# Altium PCB new.PcbDoc (part 2 of 2)
Units mil, origin at the board's own origin, x right, y up, seen from the top; angles counter-clockwise.
Board outline 4410 x 3685.04 mil, 2 copper layers (Top Layer, Bottom Layer), stack 21 mil thick; 81 components, 203 nets, 659 pads, 105 vias.
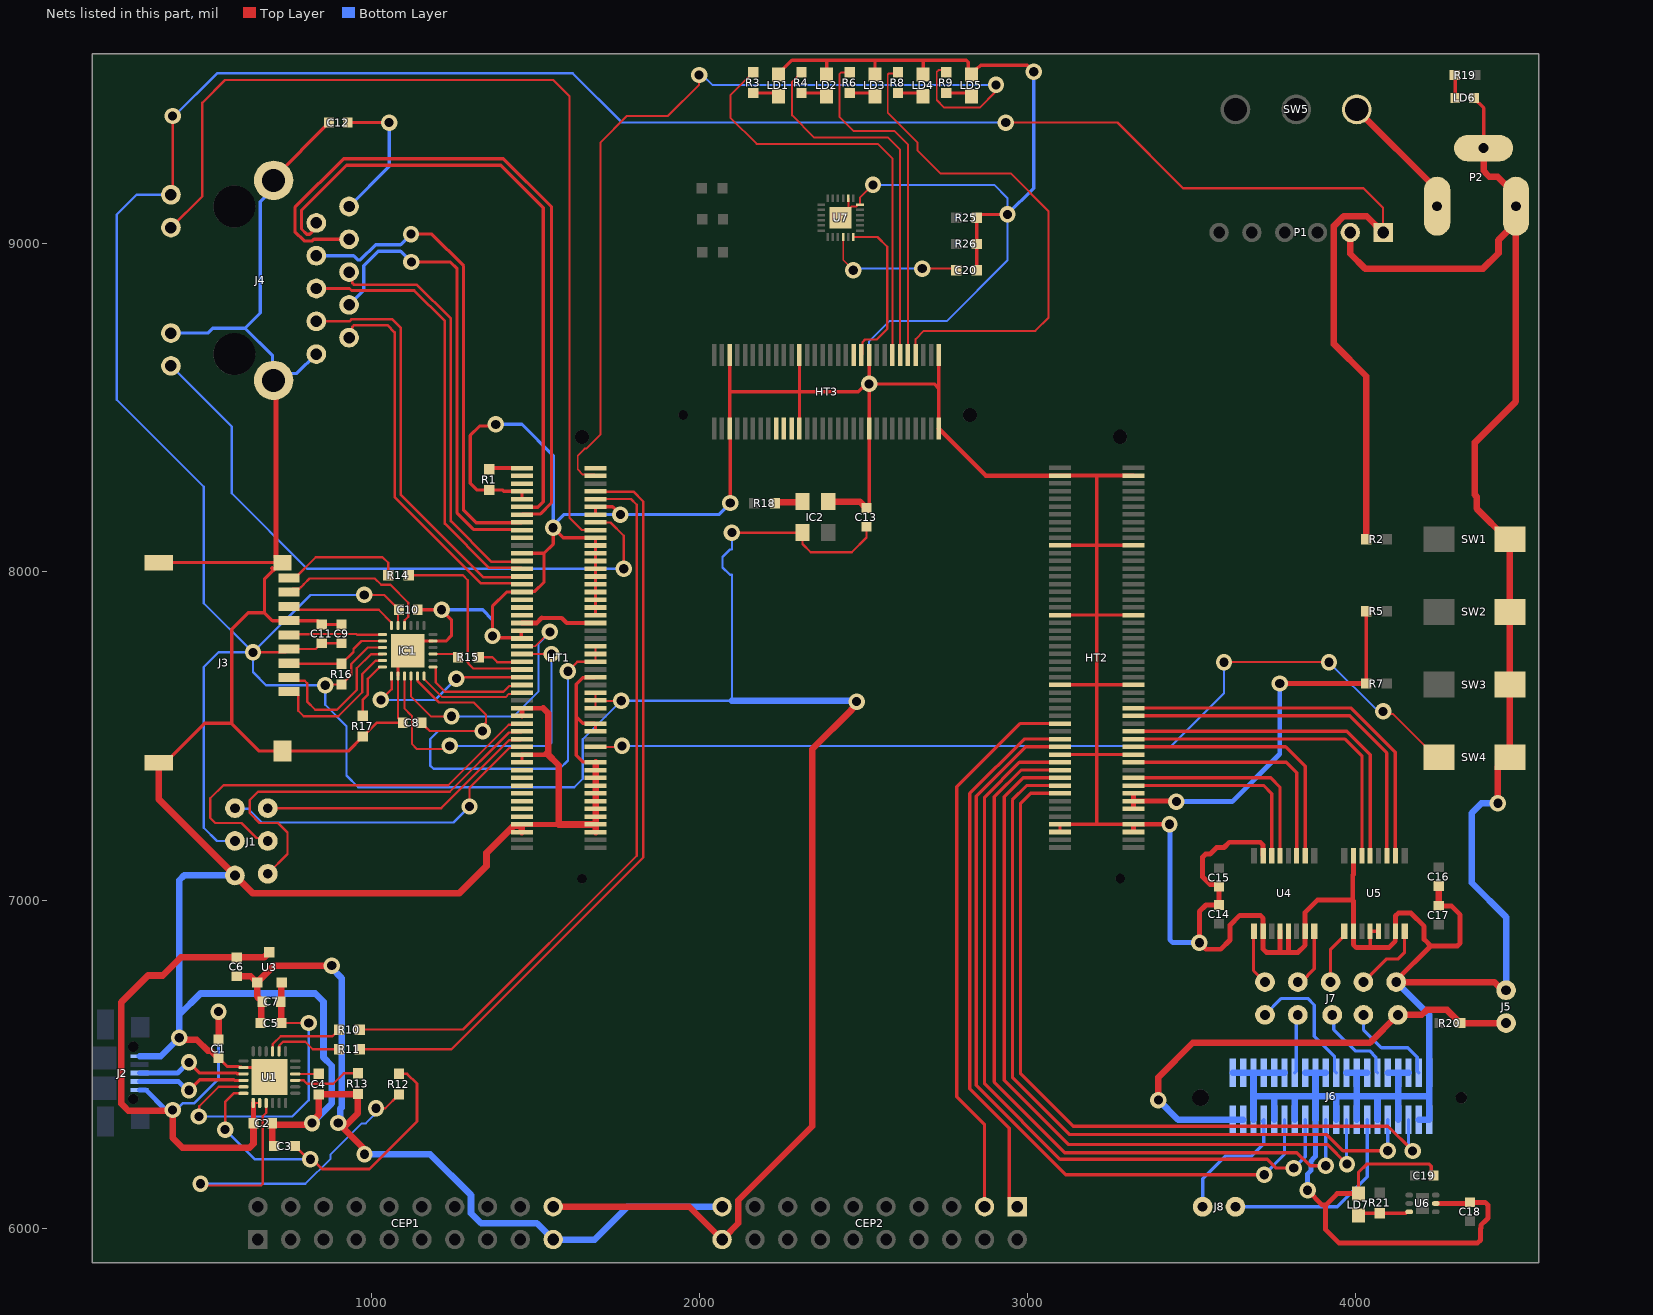
[diagram p2: the nets of this part, all layers, seen from the top]

## Via types
v1: diameter 50, hole 28, Top Layer to Bottom Layer, 103 vias
v2: diameter 39.37, hole 39.37, Top Layer to Bottom Layer, 2 vias

## Nets (pads, with @x,y where several pads share a name; then routed paths per layer and width w, separated by ;. In a path a pad name is that pad's centre, name@x,y a point inside that pad or via, vN(x,y) a via of type N, cw(c..) or ccw(c..) an arc to the next point about the centre after c; other vN are vias at no path point) (continued)
CON35: CEP2.3 HT2.A34 | length 1710.5
  Top Layer w10: CEP2.3@2870,6065 2870,6315 2785,6400 2785,7345 2978.05,7538.05 HT2.A34@3100.31,7538.05
CON36: CEP2.1 HT2.A36 | length 1664
  Top Layer w10: CEP2.1@2970,6065 2945.47,6089.53 2945.47,6304.53 2825,6425 2825,7325 2990.8,7490.8 HT2.A36@3100.31,7490.8
CS1: HT2.B39 U4.11 | length 763.3
  Top Layer w10: HT2.B39@3324.72,7419.94 3790.06,7419.94 3821.5,7388.5 U4.11@3821.5,7135
CS2: HT2.B33 U5.11 | length 1132.1
  Top Layer w10: HT2.B33@3324.72,7561.67 3983.18,7561.67 4096.5,7448.35 U5.11@4096.5,7135
DAT1: HT2.B37 U4.10 | length 820
  Top Layer w10: HT2.B37@3324.72,7467.18 3787.82,7467.18 3847.5,7407.5 U4.10@3847.5,7135
DAT2: HT2.B32 U5.10 | length 1169.2
  Top Layer w10: HT2.B32@3324.72,7585.29 3987.84,7585.29 4122.5,7450.64 U5.10@4122.5,7135
DC5V_IN: P2.1 SW5.3 | length 396.4
  Top Layer w20: SW5.3@4005,9410 4005,9409.92 4249.84,9165.08 P2.1@4249.84,9115
DOUT1: HT2.B41 U4.13 | length 667
  Top Layer w10: HT2.B41@3324.72,7372.69 3742.31,7372.69 3770.5,7344.5 U4.13@3770.5,7135
DOUT2: HT2.B42 U4.14 | length 620.5
  Top Layer w10: HT2.B42@3324.72,7349.07 3720.93,7349.07 3745.5,7324.5 U4.14@3745.5,7135
DOUT3: HT2.B35 U5.13 | length 1058.2
  Top Layer w10: HT2.B35@3324.72,7514.43 3973.86,7514.43 4045.5,7442.78 U5.13@4045.5,7135
DOUT4: HT2.B36 U5.14 | length 1021.5
  Top Layer w10: HT2.B36@3324.72,7490.8 3969.2,7490.8 4020.5,7439.5 U5.14@4020.5,7135
ETH-TD0_N: HT1.A7 J4.3 | length 2170.3
  Top Layer w10: J4.3@932.91,9000.64 919.38,9014.17 825.84,9014.17 820.84,9009.17 795.99,9009.17 767.91,9037.25 767.91,9111.2 916.72,9260 1403.28,9260 1550,9113.28 1550,8210.35 1516.65,8177.01 1499.66,8177.01 1499.58,8176.93 1461.64,8176.93 HT1.A7@1459.91,8175.2
ETH-TD0_P: HT1.A6 J4.2 | length 1949
  Top Layer w10: J4.2@832.91,9064.17 832.91,9050.64 818.42,9036.15 818.42,9035.03 812.56,9029.17 804.27,9029.17 787.91,9045.53 787.91,9102.91 925,9240 1395,9240 1525,9110 1525,8213.64 1508.37,8197.01 1499.66,8197.01 1499.58,8197.09 1461.64,8197.09 HT1.A6@1459.91,8198.82
ETH-TD1_N: HT1.A9 J4.7 | length 1426.4
  Top Layer w10: v1(1122.91,8945) 1241.72,8945 1262,8924.72 1262,8179.72 1311.95,8129.76 1420.15,8129.76 1420.23,8129.69 1458.17,8129.69 HT1.A9@1459.91,8127.95
  Bottom Layer w10: J4.7@932.91,8814.17 977.91,8859.17 977.91,8933.32 1022.1,8977.5 1089.85,8977.5 1122.35,8945 v1(1122.91,8945)
ETH-TD1_P: HT1.A8 J4.4 | length 1467
  Top Layer w10: v1(1121.8,9030) 1185,9030 1282,8933 1282,8188 1320.24,8149.76 1420.15,8149.76 1420.23,8149.84 1458.17,8149.84 HT1.A8@1459.91,8151.57
  Bottom Layer w10: J4.4@832.91,8964.17 946.55,8964.17 959.38,8951.35 967.66,8951.35 1013.81,8997.5 1089.85,8997.5 1121.8,9029.44 v1(1121.8,9030)
ETH-TD2_N: HT1.A14 J4.6 | length 1342.3
  Top Layer w8: J4.6@832.91,8864.17 934.23,8864.17 940.23,8858.17 1131.37,8858.17 1225,8764.54 1225,8147.54 1359.89,8012.65 1420.56,8012.65 1420.64,8012.57 1457.17,8012.57 HT1.A14@1459.91,8009.84
ETH-TD2_P: HT1.A13 J4.5 | length 1269.2
  Top Layer w8: J4.5@932.91,8914.17 942.86,8904.22 942.86,8880.99 947.68,8876.17 1138.83,8876.17 1243,8772 1243,8155 1367.35,8030.65 1420.56,8030.65 1420.64,8030.73 1457.17,8030.73 HT1.A13@1459.91,8033.46
ETH-TD3_N: HT1.A16 J4.9 | length 1177.7
  Top Layer w8: J4.9@932.91,8714.17 942.86,8724.12 942.86,8747.35 947.68,8752.17 1050.31,8752.17 1072,8730.49 1072,8228 1334.59,7965.41 1420.56,7965.41 1420.64,7965.33 1457.17,7965.33 HT1.A16@1459.91,7962.6
ETH-TD3_P: HT1.A15 J4.8 | length 1255
  Top Layer w8: J4.8@832.91,8764.17 934.23,8764.17 940.23,8770.17 1064.83,8770.17 1090,8745 1090,8235.46 1342.05,7983.41 1420.56,7983.41 1420.64,7983.49 1457.17,7983.49 HT1.A15@1459.91,7986.22
ETH_AVDD3V3: HT1.A10
ETH_LDA: HT1.B8 J4.14 | length 1958.5
  Top Layer w7: HT1.B8@1684.32,8151.57 1685.1,8150.79 1729.77,8150.79 1770,8110.55 v1(1770,8010)
  Bottom Layer w7: J4.14@390,8628.35 575,8443.35 575,8240 805,8010 v1(1770,8010)
ETH_LDB: HT1.B9 J4.12 | length 2968.7
  Top Layer w7: J4.12@390,9050 485,9145 485,9430 555,9500 1555,9500 1605,9450 1605,8165 1642.05,8127.95 HT1.B9@1684.32,8127.95
GND: C1.1 C2.2 C3.1 C4.1 C5.1 C6.1 C7.1 C8.2 C9.2 C10.2 C11.2 C12.1 C13.2 C14.2 C15.2 C16.2 C17.2 C18.1 C19.2 C20.1 CEP1.19 CEP2.19 HT1.A4 HT1.A5 HT1.A12 HT1.A17 HT1.A22 HT1.A23 HT1.A32 HT1.A33 HT1.A38 HT1.A39 HT1.A47 HT1.A48 HT1.B6 HT1.B7 HT1.B10 HT1.B11 HT1.B12 HT1.B13 HT1.B14 HT1.B15 HT1.B16 HT1.B17 HT1.B18 HT1.B19 HT1.B20 HT1.B28 HT1.B34 HT1.B35 HT1.B39 HT1.B40 HT1.B41 HT1.B42 HT1.B43 HT1.B44 HT1.B45 HT1.B46 HT1.B47 HT1.B48 HT2.A2 HT2.A11 HT2.A20 HT2.A29 HT2.A38 HT2.A47 HT2.A48 HT2.B2 HT2.B11 HT2.B20 HT2.B29 HT2.B38 HT2.B47 HT2.B48 HT3.A1 HT3.A10 HT3.A19 HT3.A28 HT3.B1 HT3.B10 HT3.B19 HT3.B28 IC1.2 IC1.11 IC1.P IC2.2 J1.6 J2.5 J3.0 J3.6 J3.10 J3.11 J3.12 J4.10 J4.13 J4.15 J4.16 J5.1 J6.1 J6.3 J6.4 J6.5 J6.7 J6.8 J6.9 J6.11 J6.12 J6.13 J6.15 J6.16 J6.17 J6.18 J6.19 J6.20 J6.23 J6.25 J6.27 J6.29 J6.31 J6.33 J6.35 J6.37 J6.39 J6.40 J7.9 LD1.2 LD2.2 LD3.2 LD4.2 LD5.2 LD6.K LD7.2 P1.2 P2.2 R1.1 R13.2 R17.1 R25.2 R26.2 SW1.2 SW2.2 SW3.2 SW4.2 U1.2 U1.25 U3.1 U4.2 U4.4 U4.5 U4.7 U4.15 U5.2 U5.4 U5.5 U5.7 U5.15 U6.5 U7.18 U7.20 U7.25 | length 34356.6
  Top Layer w6: U7.20@2454.72,9139.06 2454.72,9103.56 2465.41,9114.24 2479.79,9114.24 2484.92,9119.38 U7.18@2490.15,9119.38 2490.15,9140.15 v1(2530,9180)
  Top Layer w7: R17.1@975,7498.5 1016.5,7540 C8.2@1096.46,7540 1096.46,7540.98 1082.24,7555.2 IC1.2@1082.24,7683.07
  Top Layer w10: J3.11@352.36,7418.62 372.05,7418.62 492.57,7539.14 574.14,7539.14 ; J3.0@352.36,8028.86 726.38,8028.86 675,7977.48 675,7875.86 ; C1.1@535,6517.91 535.98,6517.91 561.4,6492.5 597.57,6492.5 599.91,6490.16 604.06,6490.16 604.69,6489.53 U1.2@611.26,6489.53 660.47,6489.53 U1.25@690,6460 ; J4.15@702.99,9194.09 702.99,9200.55 871.46,9369.02 C12.1@871.46,9370 ; C9.2@910,7840 C11.2@850,7840 849.02,7840 837.32,7851.69 J3.6@750,7851.69 699.16,7851.69 675,7875.86 ; R17.1@975,7498.5 930.55,7454.06 J3.12@730.32,7454.06 659.23,7454.06 574.14,7539.14 ; IC1.2@1082.24,7683.07 1082.24,7730.31 IC1.P@1111.77,7759.84 1141.3,7789.37 IC1.11@1188.54,7789.37 ; C10.2@1142.09,7885 v1(1215,7885) 1245,7855 1245,7805 1229.61,7789.61 IC1.11@1201.71,7789.61 ; v1(1380,8450) 1375,8445 1330.86,8445 1302,8416.14 1302,8270 1322,8250 R1.1@1360,8250 1399.99,8250 1403.93,8246.06 HT1.A4@1459.91,8246.06 HT1.A5@1459.91,8222.44 ; HT1.A39@1459.91,7419.29 HT1.A38@1459.91,7442.91 ; HT1.A22@1459.91,7820.87 1458.02,7818.98 1458.02,7799.13 1375.87,7799.13 v1(1370,7805) 1370,7895 1413.98,7938.98 HT1.A17@1459.91,7938.98 1461.64,7940.71 1499.58,7940.71 1527.09,7968.21 1527.09,8057.09 ; HT1.A12@1459.91,8057.09 1527.09,8057.09 ; 1532.06,7442.91 1536.03,7446.89 1540,7450.86 ; HT1.B39@1684.32,7419.29 1682.58,7421.02 1644.64,7421.02 1625,7440.66 1625,7558.77 ; HT1.B35@1684.32,7513.78 HT1.B34@1684.32,7537.4 1682.58,7539.13 1644.64,7539.13 1625,7558.77 ; HT1.B28@1684.32,7679.13 1682.58,7677.4 1644.64,7677.4 1625,7657.76 1625,7558.77 ; HT1.B20@1684.32,7868.11 HT1.B19@1684.32,7891.73 HT1.B18@1684.32,7915.35 HT1.B17@1684.32,7938.98 HT1.B16@1684.32,7962.6 HT1.B15@1684.32,7986.22 HT1.B14@1684.32,8009.84 HT1.B13@1684.32,8033.46 HT1.B12@1684.32,8057.09 HT1.B11@1684.32,8080.71 HT1.B10@1684.32,8104.33 1585.67,8104.33 v1(1555,8135) 1555,8085 1527.09,8057.09 ; HT1.B7@1684.32,8175.2 HT1.B6@1684.32,8198.82 1736.18,8198.82 v1(1760,8175) ; HT3.A28@2093.08,8661.58 2093.08,8549.37 ; v1(2094.81,8210.19) 2094.81,8435.43 HT3.B28@2093.08,8437.17 2093.08,8549.37 ; LD1.2@2241.86,9516.93 2241.86,9518.9 2282.97,9560 2390,9560 ; HT3.B19@2305.68,8437.17 2305.68,8549.37 ; HT3.A19@2305.68,8661.58 2305.68,8549.37 ; LD2.2@2388.9,9516.93 2388.9,9558.9 2390,9560 ; C13.2@2510,8195 2518.28,8203.28 HT3.B10@2518.28,8437.17 v1(2518.28,8573.28) ; HT3.A10@2518.28,8661.58 v1(2518.28,8573.28) ; LD3.2@2535.93,9516.93 2535.93,9559.07 2535,9560 ; LD4.2@2682.97,9516.93 2682.97,9557.03 2680,9560 ; HT3.B1@2730.87,8437.17 2730.87,8559.13 ; HT3.A1@2730.87,8661.58 2730.87,8559.13 ; C20.1@2846.5,8920 R26.2@2846.5,9000 R25.2@2846.5,9080 2856.5,9090 v1(2940,9090) ; v1(3020,9525) 3000,9545 2858.07,9545 2846.65,9533.58 2844.68,9533.58 2830,9518.9 LD5.2@2830,9516.93 2820,9526.93 2820,9554.14 2814.14,9560 2680,9560 ; HT2.A48@3100.31,7207.34 HT2.A47@3100.31,7230.96 3212.51,7230.96 ; HT2.A38@3100.31,7443.56 3212.51,7443.56 ; HT2.A29@3100.31,7656.16 3212.51,7656.16 ; HT2.A20@3100.31,7868.76 3212.51,7868.76 ; HT2.A11@3100.31,8081.35 3212.51,8081.35 ; 3212.51,8293.95 3212.51,8081.35 ; HT2.B47@3324.72,7230.96 3212.51,7230.96 ; HT2.B38@3324.72,7443.56 3212.51,7443.56 ; HT2.B29@3324.72,7656.16 3212.51,7656.16 ; HT2.B20@3324.72,7868.76 3212.51,7868.76 ; HT2.B11@3324.72,8081.35 3212.51,8081.35 ; LD7.2@4010,6105 4010,6170 4035,6195 4226.23,6195 4232.09,6189.14 4232.09,6166.46 C19.2@4238.54,6160 ; 4045,6855 4045.5,6855.5 U5.4@4045.5,6905 U5.5@4071.5,6905 ; U6.5@4245.49,6075 U6.5@4246.32,6075.83 ; LD6.K@4362.09,9445 4362.09,9444.02 4391.57,9414.53 P2.2@4391.57,9292 ; 574.14,7539.14 575,7540 575,7825 625.86,7875.86 675,7875.86 ; 2093.08,8549.37 2305.68,8549.37 ; 2305.68,8549.37 2485.61,8549.37 2509.52,8573.28 v1(2518.28,8573.28) ; 2390,9560 2535,9560 ; v1(2518.28,8573.28) 2716.72,8573.28 2730.87,8559.13 ; 2535,9560 2680,9560 ; 3212.51,7230.96 3212.51,7443.56 ; 3212.51,7443.56 3212.51,7656.16 ; 3212.51,7656.16 3212.51,7868.76 ; 3212.51,7868.76 3212.51,8081.35
  Top Layer w13: HT2.A2@3100.31,8293.95 3212.51,8293.95 HT2.B2@3324.72,8293.95
  Top Layer w14: HT1.A38@1459.91,7442.91 1532.06,7442.91 ; HT1.A32@1459.91,7584.65 1524.65,7584.65 ; HT3.B1@2731.14,8437.17 2874.35,8293.95 HT2.A2@3100.31,8293.95
  Top Layer w15: J4.16@702.99,8584.25 710.26,8576.99 710.26,8044.98 726.38,8028.86 J3.10@730.32,8028.86 ; HT1.A47@1459.91,7230.32 1572.11,7230.32 ; HT1.A33@1459.91,7561.02 HT1.A32@1459.91,7584.65 ; HT2.B48@3324.72,7211.22 HT2.B47@3324.72,7230.96 v1(3434.04,7230.96) v1@3435,7230 ; U4.15@3719.5,7135 3719.5,7167.31 3710.71,7176.1 3616.1,7176.1 3600,7160 3577.5,7160 3557.5,7140 3543.79,7140 3535,7131.21 3535,7070 3557.74,7047.26 3577.74,7047.26 C15.2@3585,7040 C14.2@3585,6985 3545,6985 3525,6965 v1(3525,6870) 3545,6850 3590,6850 3618.25,6878.25 3618.25,6923.25 3648.29,6953.29 3710.71,6953.29 3719.5,6944.5 U4.2@3719.5,6905 3719.5,6850.5 3730,6840 3770,6840 ; U4.4@3770.5,6905 3770.5,6840.5 3770,6840 ; U4.5@3796.5,6905 3796.5,6841 3797.5,6840 ; v1(3855,6115) 3900,6070 3910,6070 ; U5.15@3994.5,7135 3994.5,7078.39 3992.5,7076.39 3992.5,6999.75 ; LD7.2@4010,6105 3945,6105 3910,6070 ; J7.9@4125,6750 4125,6755 4230,6860 ; U6.5@4249.94,6074.67 4346.12,6074.67 C18.1@4350,6078.54 4396.21,6078.54 4405,6069.76 4405,6030 4400,6025 4400,6024.77 4383.25,6008.02 4383.25,5999.44 4382.38,5998.58 4382.38,5963.79 4373.6,5955 3950,5955 3910,5995 3910,6070 ; C17.2@4255,6982.09 4292.91,6982.09 4320,6955 4320,6868.79 4311.21,6860 4230,6860 ; 3770,6840 3797.5,6840 ; 3797.5,6840 3825,6840 3847.5,6862.5 U4.7@3847.5,6905 3847.5,6962.5 3884.75,6999.75 3992.5,6999.75 ; 3992.5,6999.75 3994.5,6997.75 U5.2@3994.5,6905 3994.5,6863.79 4003.29,6855 4045,6855 4102.7,6855 4122.15,6874.45 4122.15,6904.65 U5.7@4122.5,6905 4122.5,6951.21 4131.29,6960 4170,6960 4210,6920 4210,6880 4230,6860
  Top Layer w20: J3.11@352.36,7418.62 352.36,7307.64 J1.6@585,7075 640,7020 1268.28,7020 1351.76,7103.48 1351.76,7143.57 1435.24,7227.05 1459.91,7227.05 HT1.A48@1459.91,7206.69 ; v1@416.04,6581.04 v1(415,6580) 420.74,6574.26 468.86,6574.26 502.88,6540.24 511.69,6540.24 534.02,6517.91 C1.1@535,6517.91 ; C6.1@590,6767.91 633.43,6767.91 U3.1@652.6,6748.74 ; C5.1@663.5,6625 665.71,6627.2 665.71,6687.8 C7.1@667.91,6690 667.91,6690.98 652.6,6706.3 U3.1@652.6,6748.74 ; C2.2@698.54,6320 C2.2@698.54,6319.76 ; C3.1@705,6250 699.25,6255.75 699.25,6273.54 698.54,6274.25 C2.2@698.54,6319.76 ; v1(880,6800) 703.86,6800 U3.1@652.6,6748.74 ; v1(899.82,6320.18) v1@915,6305 ; v1(980,6225) 980,6240 v1@915,6305 ; 1524.65,7584.65 1540,7569.29 1540,7450.86 ; 1536.03,7446.89 1572.11,7410.8 1572.11,7230.32 HT1.B47@1684.32,7230.32 ; HT1.B48@1684.32,7206.69 HT1.B47@1684.32,7230.32 ; HT1.B39@1684.32,7419.29 HT1.B40@1684.32,7395.67 HT1.B41@1684.32,7372.05 HT1.B42@1684.32,7348.43 HT1.B43@1684.32,7324.8 HT1.B44@1684.32,7301.18 HT1.B45@1684.32,7277.56 HT1.B46@1684.32,7253.94 HT1.B47@1684.32,7230.32 ; IC2.2@2393.74,8214.49 2489.53,8214.49 2509.02,8195 C13.2@2510,8195 ; P1.2@3985,9035 3985,8970 4030,8925 4390,8925 4436.76,8971.76 4436.76,9011.76 P2.2@4490,9065 ; J7.9@4125,6750 4424.18,6750 4449.18,6725 J5.1@4460,6725 ; C17.2@4255,6982.09 C16.2@4255,7042.91 ; P2.2@4391.57,9292 4391.57,9222 4408.81,9204.76 4434,9204.76 4490,9148.76 P2.2@4490,9115 P2.2@4490,9065 ; v1(4435,7295) 4435,7405.63 4464.37,7435 SW4.2@4471.54,7435 SW3.2@4471.54,7656.67 SW2.2@4471.54,7878.33 SW1.2@4471.54,8100 4463.66,8100 4370,8193.66 4370,8230 4365,8235 4365,8395 4490,8520 P2.2@4490,9065 ; C2.2@698.54,6319.76 703.31,6315 810,6315 840,6345 C4.1@840,6407.01 840.75,6407.76 959.25,6407.76 R13.2@960,6408.5 960,6350 v1@915,6305
  Bottom Layer w6: v1(2518.28,8573.28) 2518.28,8703.28 2580,8765 2755,8765 2940,8950 v1(2940,9090) 2940,9140 2900,9180 v1(2530,9180)
  Bottom Layer w10: J4.13@390,8728.35 502.17,8728.35 517,8743.17 615.64,8743.17 ; J4.15@702.99,9194.09 702.99,9170.19 661.91,9129.11 661.91,8789.45 615.64,8743.17 ; J4.10@832.91,8664.17 774.04,8605.3 724.04,8605.3 J4.16@702.99,8584.25 699.56,8587.69 699.56,8659.25 615.64,8743.17 ; v1(1215,7885) 1340,7885 1370,7855 v1(1370,7805) ; v1(1380,8450) 1460,8450 1555,8355 v1@1555,8143.06 ; v1(1555,8135) v1@1555,8143.06 ; v1(2094.81,8210.19) 2059.62,8175 v1(1760,8175) 1586.94,8175 v1@1555,8143.06 ; v1(2940,9090) 3020,9170 v1(3020,9525)
  Bottom Layer w15: v1(3434.04,7230.96) 3435,7230 3435,6878.79 3443.79,6870 v1(3525,6870) ; v1(3855,6115) 3855,6165 3865,6175 3865,6203.18 3869.98,6208.16 3869.98,6209.61 3878.97,6218.6 J6.29@3878.97,6330
  Bottom Layer w20: J2.5@294.33,6523.82 358.82,6523.82 v1(415,6580) 415,6650 ; J1.6@585,7075 430,7075 415,7060 415,6650 ; v1(820,6320) 880,6380 880,6495 855,6520 855,6690 830,6715 480,6715 415,6650 ; v1(880,6800) 880,6791.88 910,6761.88 910,6367.57 905.56,6363.13 905.56,6325.92 v1(899.82,6320.18) ; v1(980,6225) 1180,6225 1304.53,6100.47 1304.53,6045.43 1335.43,6014.53 1505.47,6014.53 CEP1.19@1555,5965 1681.7,5965 1781.7,6065 CEP2.19@2070,6065 ; J6.20@3627,6473.31 J6.19@3658.5,6473.31 J6.18@3690,6473.31 ; J6.23@3690,6330 3690,6401.65 ; J6.25@3752.99,6330 3752.99,6399.65 3755,6401.65 ; J6.15@3784.48,6473.31 J6.16@3752.99,6473.31 J6.17@3721.49,6473.31 J6.18@3690,6473.31 ; J6.27@3815.98,6330 3815.98,6397.64 3820,6401.65 ; J6.13@3847.48,6473.31 J6.12@3878.97,6473.31 ; J6.29@3878.97,6330 3878.97,6401.65 ; J6.11@3910.47,6473.31 J6.12@3878.97,6473.31 ; J6.31@3941.96,6330 3941.96,6399.69 3940,6401.65 ; J6.9@3973.46,6473.31 J6.8@4004.96,6473.31 ; J6.33@4004.96,6330 4004.96,6401.61 4005,6401.65 4065,6401.65 ; J6.7@4036.45,6473.31 J6.8@4004.96,6473.31 ; J6.35@4067.95,6330 4067.95,6398.7 4065,6401.65 ; J6.5@4099.44,6473.31 J6.4@4130.94,6473.31 ; J7.9@4125,6750 4225.43,6649.57 J6.1@4225.43,6473.31 4225.43,6401.65 ; J6.37@4130.94,6330 4130.94,6400.72 4130,6401.65 ; J6.3@4162.44,6473.31 J6.4@4130.94,6473.31 ; J6.39@4193.93,6330 J6.40@4225.43,6330 4225.43,6401.65 ; v1(4435,7295) 4385,7295 4355,7265 4355,7052.91 4460,6947.91 J5.1@4460,6725 ; 3690,6401.65 3755,6401.65 ; 3690,6401.65 J6.18@3690,6473.31 ; 3755,6401.65 3820,6401.65 ; 3820,6401.65 3878.97,6401.65 ; 3878.97,6401.65 3940,6401.65 ; 3878.97,6401.65 J6.12@3878.97,6473.31 ; 3940,6401.65 4004.96,6401.65 J6.8@4004.96,6473.31 ; 4065,6401.65 4130,6401.65 ; 4130,6401.65 4130.94,6402.6 J6.4@4130.94,6473.31 ; 4130,6401.65 4225.43,6401.65
H17: HT3.B22
IFI1: J6.10 J7.2 | length 413.4
  Bottom Layer w10: J7.2@3725,6650 3775,6700 3855,6700 3875,6680 3875,6585 3937.12,6522.88 3937.12,6478.15 J6.10@3941.96,6473.31
IFI2: J6.6 J7.6 | length 259.9
  Bottom Layer w10: J7.6@3930,6650 3935,6645 3935,6605 4000,6540 4044.52,6540 4063.11,6521.41 4063.11,6478.15 J6.6@4067.95,6473.31
IFQ1: J6.14 J7.4 | length 180.4
  Bottom Layer w10: J6.14@3815.98,6473.31 3820.49,6477.82 3820.49,6645.49 J7.4@3825,6650
IFQ2: J6.2 J7.8 | length 293.8
  Bottom Layer w10: J7.8@4025,6650 4025,6605 4080,6550 4160.51,6550 4189.09,6521.42 4189.09,6478.15 J6.2@4193.93,6473.31
J16: HT3.B20
K16: HT3.B21
K17: HT3.A12
K18: HT3.A11 U7.12 | length 497.1
  Top Layer w7: U7.12@2472.16,9020.94 2544.05,9020.94 2573.5,8991.5 2573.5,8740.42 2541.62,8708.54 2505.79,8708.54 2497.89,8700.63 2497.89,8664.81 HT3.A11@2494.65,8661.58
LED1: HT3.A7 R3.2 | length 1312.5
  Top Layer w6: R3.2@2165,9522.9 2095,9452.9 2095,9385 2175,9305 2545,9305 2590,9260 2590,8662.43 HT3.A7@2589.14,8661.58
LED2: HT3.A6 R4.2 | length 1141.5
  Top Layer w6: R4.2@2312.03,9522.9 2283.29,9494.15 2283.29,9391.71 2350,9325 2575,9325 2612.76,9287.24 HT3.A6@2612.76,8661.58
LED3: HT3.A5 R6.2 | length 1049.5
  Top Layer w6: R6.2@2459.07,9522.9 2432.9,9522.9 2427.49,9517.49 2427.49,9387.51 2470,9345 2595,9345 2636.39,9303.61 HT3.A5@2636.39,8661.58
LED4: HT3.A4 R8.2 | length 1584.5
  Top Layer w6: R8.2@2606.1,9522.9 2603.2,9520 2578.51,9520 2575,9516.49 2575,9400 2665,9310 2665,9285 2735,9215 2950,9215 3065,9100 3065,8775 3025,8735 2685,8735 2660.01,8710.01 HT3.A4@2660.01,8661.58
LED5: HT1.B2 R9.2 | length 2762.3
  Top Layer w6: HT1.B2@1684.32,8293.31 1680.58,8297.04 1645.47,8297.04 1630,8312.51 1630,8355 1651.03,8376.03 1656.6,8376.03 1700,8419.43 1700,9310 1780,9390 1905,9390 2000,9485 v1(2000,9515) ; R9.2@2753.14,9522.9 2746.04,9530 2730,9530 2724.39,9524.39 2724.39,9438.78 2747.82,9415.35 2855.07,9415.35 2905,9465.28 v1(2905,9485)
  Bottom Layer w6: v1(2000,9515) 2010,9515 2040,9485 v1(2905,9485)
NetC4_2: C4.2 U1.16 | length 71.3
  Top Layer w7: U1.16@768.74,6469.84 839.84,6469.84 C4.2@840,6470
NetC12_2: C12.2 J4.1 | length 432.9
  Top Layer w10: C12.2@928.54,9370 v1(1055,9370)
  Bottom Layer w10: J4.1@932.91,9114.17 1055,9236.26 v1(1055,9370)
NetC20_2: C20.2 U7.10 | length 431.4
  Top Layer w5: U7.10@2438.97,9020.94 2438.97,8951.03 v1(2470,8920) ; v1(2680,8925) 2778.5,8925 C20.2@2783.5,8920
  Bottom Layer w5: v1(2470,8920) 2475,8925 v1(2680,8925)
NetIC1_24: IC1.24 R17.2 | length 179.2
  Top Layer w7: R17.2@975,7561.5 975,7610.96 990.25,7626.21 990.25,7674.74 1026.14,7710.63 IC1.24@1035,7710.63
NetIC2_3: IC2.3 R18.2 | length 85.4
  Top Layer w20: R18.2@2231.5,8210 2233.74,8212.24 2312.76,8212.24 IC2.3@2315,8214.49
NetLD1_1: LD1.1 R3.1 | length 81
  Top Layer w10: R3.1@2165,9459.91 2231.95,9459.91 LD1.1@2241.86,9450
NetLD2_1: LD2.1 R4.1 | length 81
  Top Layer w10: R4.1@2312.03,9459.91 2378.99,9459.91 LD2.1@2388.9,9450
NetLD3_1: LD3.1 R6.1 | length 81
  Top Layer w10: R6.1@2459.07,9459.91 2526.02,9459.91 LD3.1@2535.93,9450
NetLD4_1: LD4.1 R8.1 | length 81
  Top Layer w10: R8.1@2606.1,9459.91 2673.06,9459.91 LD4.1@2682.97,9450
NetLD5_1: LD5.1 R9.1 | length 81
  Top Layer w10: R9.1@2753.14,9459.91 2820.09,9459.91 LD5.1@2830,9450
NetLD6_A: LD6.A R19.2 | length 70.6
  Top Layer w10: R19.2@4303.5,9515 4305,9513.5 LD6.A@4305,9445
NetLD7_1: LD7.1 R21.1 U6.3 | length 159.2
  Top Layer w10: LD7.1@4010,6038.07 4016.93,6045 R21.1@4075,6045 4154.14,6045 4158.55,6049.41 U6.3@4164.51,6049.41
NetR10_1: R10.1 U1.21 | length 242.2
  Top Layer w7: U1.21@699.84,6538.74 700.39,6539.28 700.39,6560.83 724.55,6585 882.01,6585 R10.1@902.01,6605
NetR11_1: R11.1 U1.20 | length 214.2
  Top Layer w7: U1.20@719.53,6538.74 720.07,6539.28 720.07,6556.48 731.58,6567.99 799.18,6567.99 822.17,6545 R11.1@902.01,6545
NetR12_1: R12.1 U1.9 | length 1178.7
  Top Layer w7: v1(480,6135) 485,6130 665,6130 670,6135 670,6341.06 680.16,6351.22 U1.9@680.16,6381.26 ; v1(1015,6365) 1042.99,6365 R12.1@1085,6407.01
  Bottom Layer w6: 800,6135 876.47,6211.47 876.47,6224.56 970.92,6319 984,6319 v1@1006.77,6341.77
  Bottom Layer w7: v1(480,6135) 800,6135 ; v1@1006.77,6341.77 1006.77,6356.77 v1(1015,6365)
NetR13_1: R13.1 U1.15 | length 208.5
  Top Layer w7: U1.15@768.74,6450.16 794.84,6450.16 805,6440 885,6440 916.5,6471.5 R13.1@960,6471.5
OTG_D+: HT1.A18
OTG_D-: HT1.A19
OTG_ID: HT1.A20
PS_RST: HT1.B37 SW4.1 | length 2853.5
  Top Layer w6: HT1.B37@1684.32,7466.54 1761.54,7466.54 v1(1765,7470) ; v1(3600,7725) v1(3920,7725) ; v1(4085,7575) 4093.42,7566.58 4115.55,7566.58 4247.13,7435 SW4.1@4255,7435
  Bottom Layer w6: v1(1765,7470) 3440,7470 3600,7630 v1(3600,7725) ; v1(3920,7725) 4070,7575 v1(4085,7575)
R_ANA: J6.34 J8.2 | length 612.9
  Bottom Layer w10: J8.2@3635,6065 3945,6065 4036.45,6156.45 J6.34@4036.45,6330
R_CLK: HT2.A39 J6.28 | length 2358.6
  Top Layer w10: HT2.A39@3100.31,7419.94 2976.51,7419.94 2870,7313.43 2870,6440 3100,6210 3731.57,6210 3758.63,6182.94 v1(3812.94,6182.94)
  Bottom Layer w10: v1(3812.94,6182.94) 3847.48,6217.48 J6.28@3847.48,6330
R_DAT: HT2.A41 J6.32 | length 2345.5
  Top Layer w10: HT2.A41@3100.31,7372.69 2987.69,7372.69 2930,7315 2930,6450 3125,6255 3915,6255 v1(3975,6195)
  Bottom Layer w10: J6.32@3973.46,6330 3973.46,6196.54 v1(3975,6195)
R_LEP: HT2.A40 J6.30 | length 2360.2
  Top Layer w10: HT2.A40@3100.31,7396.32 2981.17,7396.32 2900,7315.15 2900,6445 3115,6230 3822.45,6230 3862.45,6190 v1(3910.47,6190)
  Bottom Layer w10: v1(3910.47,6190) J6.30@3910.47,6330
R_LER: HT2.A37 J6.26 | length 2382.9
  Top Layer w10: HT2.A37@3100.31,7467.18 2995.47,7467.18 2845,7316.72 2845,6435 3117.5,6162.5 v1(3722.5,6162.5)
  Bottom Layer w10: v1(3722.5,6162.5) 3784.48,6224.48 J6.26@3784.48,6330
R_MUX: HT2.A42 J6.36 | length 2341.2
  Top Layer w10: HT2.A42@3100.31,7349.07 2999.07,7349.07 2955,7305 2955,6460 3130,6285 3913.28,6285 3962.72,6235.56 v1(4099.44,6235.56)
  Bottom Layer w10: J6.36@4099.44,6330 v1(4099.44,6235.56) v1@4100,6235
R_TXD: HT2.A43 J6.38 | length 2350.5
  Top Layer w10: HT2.A43@3100.31,7325.45 3010.45,7325.45 2980,7295 2980,6470 3140,6310 4100,6310 v1(4175,6235)
  Bottom Layer w10: J6.38@4162.44,6330 4162.44,6247.56 v1(4175,6235)
R_VT: J6.24 J8.1 | length 396
  Bottom Layer w10: J8.1@3535,6065 3535,6150 3605,6220 3685,6220 3721.49,6256.49 J6.24@3721.49,6330 J6.24@3716.65,6325.16
RAD_VCC: J5.2 J6.21 J6.22 J7.10 R20.2 | length 1514.8
  Top Layer w20: v1(3400,6390) 3400,6460 3505,6565 4045,6565 J7.10@4130,6650 4202.91,6650 4217.91,6665 4280,6665 R20.2@4320,6625 J5.2@4460,6625
  Bottom Layer w20: v1(3400,6390) 3460,6330 J6.21@3627,6330 J6.22@3658.5,6330
RIN1: J7.1 U4.1 | length 170.1
  Top Layer w10: U4.1@3691.5,6905 3690,6903.5 3690,6785 J7.1@3725,6750
RIN2: J7.3 U4.8 | length 181.8
  Top Layer w10: J7.3@3825,6750 3835,6750 3875,6790 3875,6904.5 U4.8@3875.5,6905
RIN3: J7.5 U5.1 | length 172.2
  Top Layer w10: J7.5@3925,6750 3925,6849.75 3966.5,6891.25 U5.1@3966.5,6905
RIN4: J7.7 U5.8 | length 227.5
  Top Layer w10: J7.7@4025,6750 4095,6820 4130,6820 4150.5,6840.5 U5.8@4150.5,6905
SD1_CD: HT1.A40
SD1_CLK: HT1.A41
SD1_CMD: HT1.A42
SD1_D0: HT1.A44
SD1_D1: HT1.A45
SD1_D2: HT1.A46
SD1_D3: HT1.A43
SD_CCLK: HT1.A26 R15.2 | length 138.7
  Top Layer w7: R15.2@1327.99,7740 1370,7740 1385,7725 1458.53,7725 HT1.A26@1459.91,7726.38
SD_CCLK_R: IC1.9 R15.1 | length 80.6
  Top Layer w7: IC1.9@1188.54,7750 1255,7750 R15.1@1265,7740
SD_CD: HT1.A27 R14.1 | length 611.9
  Top Layer w7: R14.1@1115,7990 1280,7990 1295,7975 1295,7724.3 1296.87,7722.43 1296.87,7720.53 1311.42,7705.99 1456.67,7705.99 HT1.A27@1459.91,7702.76
SD_CD_L: J3.9 R14.2 | length 373.3
  Top Layer w7: J3.9@750,7981.61 767.72,7981.61 831.1,8045 1035,8045 1052.01,8027.99 R14.2@1052.01,7990
SD_CMD: HT1.A24 IC1.4 | length 807.2
  Top Layer w6: IC1.4@1121.61,7683.07 1121.61,7620.83 1182.44,7560 v1(1245,7560) ; HT1.A24@1459.91,7773.62 1501.12,7773.62 v1(1545,7817.5)
  Bottom Layer w6: v1(1245,7560) 1435,7560 1510,7635 1510,7780 1545,7815 v1(1545,7817.5)
SD_D0: HT1.A30 IC1.6 | length 336.4
  Top Layer w6: IC1.6@1160.98,7683.07 1160.98,7674.21 1216.7,7618.5 1410.4,7618.5 1420.06,7628.16 1456.17,7628.16 HT1.A30@1459.91,7631.89
SD_D1: HT1.A29 IC1.7 | length 338.2
  Top Layer w7: IC1.7@1188.54,7710.63 1195.56,7710.63 1196.88,7709.32 1196.88,7663.12 1225,7635 1403.57,7635 1420.85,7652.28 1456.67,7652.28 HT1.A29@1459.91,7655.51
SD_D2: HT1.A28 IC1.1 | length 545.1
  Top Layer w7: v1(1030,7610) 1062.56,7642.56 IC1.1@1062.56,7683.07 ; v1(1260,7675) 1264.01,7679.01 1459.78,7679.01 HT1.A28@1459.91,7679.13
  Bottom Layer w7: v1(1030,7610) 1195,7610 v1(1260,7675)
SD_D3: HT1.A25 IC1.3 | length 1018.3
  Top Layer w6: IC1.3@1102.66,7682.34 IC1.3@1101.93,7683.07 1101.93,7583.42 1120.18,7565.18 1124.22,7561.13 1124.22,7475.78 1140,7460 1230,7460 v1(1240,7470) ; HT1.A25@1459.91,7750 v1(1550,7750)
  Bottom Layer w6: v1(1240,7470) 1540,7470 1550,7480 v1(1550,7750)
TCK-JTAG: HT1.A36 J1.1 | length 862
  Top Layer w7: J1.1@685,7280 1213.5,7280 1420.43,7486.93 1456.67,7486.93 HT1.A36@1459.91,7490.16
TDI-JTAG: HT1.A34 J1.3 | length 1308.1
  Top Layer w7: J1.3@685,7180 675.86,7189.14 650.86,7189.14 605,7235 525,7235 510,7250 510,7310 550,7350 1235.42,7350 1419.59,7534.17 1456.67,7534.17 HT1.A34@1459.91,7537.4
TDO-JTAG: HT1.A35 J1.5 | length 1246.6
  Top Layer w7: J1.5@685,7080 745,7140 745,7205.9 715.9,7235 660,7235 630,7265 630,7305 655,7330 1239.46,7330 1420.01,7510.55 1456.67,7510.55 HT1.A35@1459.91,7513.78
TF_CLK: IC1.19 J3.5 | length 287
  Top Layer w7: J3.5@750,7808.39 751.61,7810 827.48,7810 828.66,7811.18 954.88,7811.18 957.01,7809.06 IC1.19@1035,7809.06
TF_CMD: IC1.20 J3.3 R16.1 | length 319.6
  Top Layer w7: J3.3@750,7721.77 751.77,7720 R16.1@910,7720 946.44,7756.44 946.44,7765.18 970.63,7789.37 IC1.20@1035,7789.37
TF_DAT0: IC1.18 J3.7 | length 341.9
  Top Layer w7: J3.7@750,7895 760,7885 1023.03,7885 1062.56,7845.47 IC1.18@1062.56,7836.61
TF_DAT1: IC1.16 J3.8 | length 485.8
  Top Layer w7: J3.8@750,7938.31 760.28,7948.59 780.68,7948.59 786.43,7954.33 787.09,7954.33 795,7962.24 795,7962.9 812.1,7980 1011.42,7980 1030.67,7960.75 1058.85,7960.75 1113.26,7906.34 1113.26,7863.66 1102.47,7852.87 1102.47,7837.16 IC1.16@1101.93,7836.61
TF_DAT2: IC1.23 J3.1 | length 447.5
  Top Layer w7: J3.1@750,7635.16 767.7,7635.16 777.98,7624.88 777.98,7577.02 795,7560 900,7560 973.25,7633.25 973.25,7689.15 1013.87,7729.77 1034.46,7729.77 IC1.23@1035,7730.31
TF_DAT3: IC1.22 J3.2 | length 467.6
  Top Layer w7: J3.2@750,7678.46 760.28,7668.18 797.71,7668.18 805,7660.9 805,7605 830,7580 895.96,7580 956.25,7640.29 956.25,7706.25 999.46,7749.46 1034.46,7749.46 IC1.22@1035,7750
TMS-JTAG: HT1.A37 J1.2 | length 1021.9
  Top Layer w7: v1(1300,7285) 1300,7342.45 1420.85,7463.3 1456.67,7463.3 HT1.A37@1459.91,7466.54
  Bottom Layer w7: J1.2@585,7280 587.02,7277.98 625.5,7277.98 666.98,7236.5 1251.5,7236.5 v1(1300,7285)
UART-D+: HT1.A3
UART-D-: HT1.A2
UART_RXD: HT1.B4 R11.2 | length 2350.9
  Top Layer w7: R11.2@965,6545 1245,6545 1830,7130 1830,8215 1800,8245 1685.38,8245 HT1.B4@1684.32,8246.06
UART_TXD: HT1.B5 R10.2 | length 2267.4
  Top Layer w7: R10.2@965,6605 1280,6605 1810,7135 1810,8205 1792.56,8222.44 HT1.B5@1684.32,8222.44
USB5V0: HT1.A21 HT1.B21 | length 237.3
  Top Layer w13: 1520,7860 1581.04,7860 1596.55,7844.49 HT1.B21@1684.32,7844.49
  Top Layer w14: HT1.A21@1459.91,7844.49 1504.49,7844.49 1520,7860
USB_1V8: C5.2 C7.2 U1.5 U3.2 | length 990.9
  Top Layer w7: v1(475,6340) 476.4,6341.4 476.4,6371.4 535.47,6430.47 U1.5@611.26,6430.47 ; C5.2@725.75,6625.75 C5.2@726.5,6625 v1(810,6625)
  Top Layer w20: C5.2@725.75,6625.75 725.75,6689.25 C7.2@725,6690 726.2,6691.2 726.2,6747.54 U3.2@727.4,6748.74
  Bottom Layer w7: v1(475,6340) 760,6340 810,6390 v1(810,6625)
USB_5V: HT1.B1
USB_5VIN: C1.2 C2.1 C6.2 J2.1 U1.7 U1.8 U3.3 | length 2074.5
  Top Layer w7: U1.7@640.79,6381.26 U1.8@660.47,6381.26
  Top Layer w15: U1.7@640.79,6381.26 641.12,6380.93 641.12,6320.33 C2.1@641.46,6320
  Top Layer w20: C1.2@535,6575 v1(535,6660) ; C2.1@641.46,6320 641.46,6256.72 629.74,6245 425,6245 395,6275 395,6355.76 392.88,6357.88 259.96,6357.88 248.95,6368.89 238.77,6379.07 238.77,6688.77 320,6770 365,6770 420,6825 C6.2@590,6825 673.74,6825 U3.3@690,6841.26
  Bottom Layer w8: v1(395,6360) 405.33,6360 426.33,6381 461.15,6381 535,6454.85 v1(535,6660)
  Bottom Layer w15: J2.1@294.33,6421.46 312.89,6421.46 374.35,6360 v1(395,6360)
USB_UART_D+: J2.3 U1.3 | length 329.5
  Top Layer w10: v1(445,6505) 477.5,6472.5 589.29,6472.5 591.63,6470.16 U1.3@595.78,6470.16
  Bottom Layer w15: J2.3@294.33,6472.64 294.55,6472.42 329.14,6472.42 329.22,6472.34 410,6472.34 442.66,6505 v1(445,6505)
USB_UART_D-: J2.2 U1.4 | length 327.8
  Top Layer w10: v1(445,6420) 477.5,6452.5 581,6452.5 583.58,6449.92 U1.4@596.12,6449.92
  Bottom Layer w15: J2.2@294.33,6447.05 294.55,6447.26 329.14,6447.26 329.22,6447.34 412.66,6447.34 440,6420 v1(445,6420)
VBAT: HT1.A1 R1.2 | length 101.5
  Top Layer w13: R1.2@1360,8312.99 1363.7,8316.7 1459.67,8316.7 HT1.A1@1459.91,8316.93
VCC1V8: C8.1 HT1.B24 HT1.B25 HT1.B26 IC1.5 | length 1619
  Top Layer w7: IC1.5@1141.3,7683.07 1141.84,7682.53 1141.84,7667.3 1207.15,7602 1313,7602 1350,7565 1350,7540.6 1348.23,7538.83 1348.23,7523.23 v1(1340,7515) 1178.54,7515 1165.79,7527.75 1164.81,7527.75 1153.54,7539.02 C8.1@1153.54,7540 ; v1(1600,7697.54) 1628.84,7726.38 HT1.B26@1684.32,7726.38 HT1.B25@1684.32,7750 HT1.B24@1684.32,7773.62
  Bottom Layer w7: v1(1340,7515) 1205,7515 1180,7490 1180,7410 1190,7400 1575,7400 1600,7425 v1(1600,7697.54)
VCC3V3: C9.1 C10.1 C11.1 C13.1 CEP1.20 CEP2.20 HT1.B30 HT1.B31 HT1.B32 IC1.17 IC1.21 IC2.4 J1.4 J3.4 J4.11 P1.1 R2.2 R16.2 | length 14872.9
  Top Layer w7: J4.11@390,9150 395,9155 v1(395,9390) ; v1(640,7755) 739.92,7755 J3.4@750,7765.08 831.18,7765.08 849.02,7782.91 C11.1@850,7782.91 C9.1@910,7782.91 ; v1(860,7655) 862.01,7657.01 R16.2@910,7657.01 939.25,7686.26 939.25,7719.25 989.69,7769.69 IC1.21@1035,7769.69 ; v1(979,7930) 1040,7930 1072.75,7897.25 1073.74,7897.25 1085,7885.98 C10.1@1085,7885 1082.24,7882.24 IC1.17@1082.24,7836.61 ; HT1.B32@1684.32,7584.65 HT1.B31@1684.32,7608.27 ; HT1.B30@1684.32,7631.89 HT1.B31@1684.32,7608.27 ; v1(1762.48,7607.48) 1761.63,7606.63 1685.95,7606.63 HT1.B31@1684.32,7608.27 ; v1(2100,8120) IC2.4@2315,8120 2315,8085 2340,8060 2465,8060 2510,8105 C13.1@2510,8137.91 ; v1(2935,9370) 3275,9370 3475,9170 4025,9170 4085,9110 P1.1@4085,9035
  Top Layer w20: CEP1.20@1555,6065 1970,6065 2064.57,5970.43 2075.43,5970.43 2119.53,6014.53 2119.53,6084.57 2345,6310.04 2345,7460 2466.11,7581.11 2466.11,7582.99 2480,7596.88 v1(2480,7605) ; R2.2@4033.5,8100 4033.5,8596.5 3935,8695 3935,9055.04 3964.49,9084.53 4035.47,9084.53 P1.1@4085,9035
  Bottom Layer w7: J4.11@390,9150 285,9150 225,9090 225,8525 490,8260 490,7905 v1(640,7755) ; v1(395,9390) 400,9390 530,9520 1615,9520 1765,9370 v1(2935,9370) ; J1.4@585,7180 530,7180 490,7220 490,7710 535,7755 v1(640,7755) ; v1(979,7930) 815,7930 v1(640,7755) ; v1(2100,8120) 2100,8068.5 2094.05,8068.5 2071.5,8045.95 2071.5,8014.05 2094.05,7991.5 2100,7991.5 2100,7607.48 v1(1762.48,7607.48) 1645,7490 1645,7370 1619.1,7344.1 960.9,7344.1 925,7380 925,7530 860,7595 v1(860,7655) 680,7655 640,7695 v1(640,7755)
  Bottom Layer w20: 2100,7607.48 2477.52,7607.48 v1(2480,7605)
VCC_ADJ: HT2.B43 HT2.B44 HT2.B45 R5.2 R7.2 | length 1251.8
  Top Layer w10: R7.2@4033.5,7660 R5.2@4033.5,7880
  Top Layer w15: HT2.B45@3324.72,7278.21 HT2.B44@3324.72,7301.83 ; HT2.B43@3324.72,7325.45 HT2.B44@3324.72,7301.83 ; v1(3455,7300) 3453.17,7301.83 HT2.B44@3324.72,7301.83 ; v1(3770,7660) R7.2@4033.5,7660
  Bottom Layer w15: v1(3455,7300) 3625,7300 3770,7445 v1(3770,7660)
VDD: C3.2 R12.2 U1.6 | length 1092.7
  Top Layer w8: v1(555,6300) 555,6385 580.79,6410.79 U1.6@611.26,6410.79 ; C3.2@767.99,6250 807.99,6210 v1(815,6210) 820.69,6210 850.69,6180 995,6180 1140,6325 1140,6440 1110,6470 R12.2@1085,6470
  Bottom Layer w8: v1(555,6300) 645,6210 v1(815,6210)
pads on no net: "J4. " HT1.A11 HT1.A31 HT1.B22 HT1.B23 HT1.B27 HT1.B29 HT1.B33 HT1.B36 HT1.B38 HT1.C1 HT1.C2 HT2.A1 HT2.A44 HT2.A45 HT2.A46 HT2.B1 HT2.B30 HT2.B31 HT2.B46 HT2.C1 HT2.C2 HT3.B2 HT3.B3 HT3.B4 HT3.B5 HT3.B6 HT3.B7 HT3.B13 HT3.B14 HT3.B17 HT3.B18 HT3.B24 HT3.B25 HT3.C1 HT3.C2 IC1.8 IC1.10 IC1.12 IC1.13 IC1.14 IC1.15 IC2.1 J2.0 J2.4 J2.M1 J2.M2 J2.S1 J2.S2 J2.S3 J2.S4 J6. SW5.1 U1.1 U1.10 U1.11 U1.12 U1.13 U1.14 U1.17 U1.18 U1.19 U1.22 U1.23 U1.24 U6.2 U6.7 U7.2 U7.3 U7.4 U7.5 U7.6 U7.7 U7.14 U7.15 U7.16 U7.17 U7.19 U7.21
copper on no net:
  other v2: 336.61,7603.66 336.61,7918.62

## Polygon pours and split planes (outlines as drawn)
GND on Bottom Layer "NONET_L01_P-001" (solid, pour order 1): 150,9580.04 4559.96,9580.04 4560,9580 4560,5895 150,5895
GND on Bottom Layer "NONET_L01_P-001" (solid, pour order 2): 135,6000
GND on Top Layer "NONET_L01_P-001" (solid, pour order 3): 150.55,9580 150.59,9580.04 4560,9580.04 4560,5895 150.55,5895

## Keep-outs
Keep-Out Layer:
  circle w10: c250,9485 r55.12
  circle w10: c250,5975 r55.12
  circle w10: c250,7140 r55.12
  circle w10: c250,8320 r55.12
  circle w10: c1805,5975 r55.12
  circle w10: c1805,9485 r55.12
  circle w10: c3185,5975 r55.12
  circle w10: c3185,9485 r55.12
  circle w10: c4460,5975 r55.12
  circle w10: c4460,7140 r55.12
  circle w10: c4460,8320 r55.12
  circle w10: c4465.62,9485.83 r55.12

## Other copper
Multi-Layer:
  lines w10: 150,5895 150,9580.04 ; 150.55,5895 4560,5895 4560,9580.04 ; 150.55,9580 4560,9580

## Silkscreen, mask and mechanical layers (free items; w line width, h text height)
Top Overlay:
  text "24G雷达底板" at 1975,6858.51 h200
  text "BY:HZH" at 2105,6635 h200
  text "2023-12-24" at 2050,6427.41 h200
Bottom Overlay:
  drawing of 10159 lines, arcs and shapes, not listed

## Text inside footprints (layer, text, board x,y; h text height)
CEP1: Top Overlay "19" at 1621.22,5945 h30; Top Overlay "20" at 1619.57,6043.74 h30; Top Overlay "2" at 555,6045 h30; Top Overlay "1" at 555,5945 h30
CEP2: Top Overlay "19" at 2003.78,6085 h30 r180; Top Overlay "20" at 2005.43,5986.26 h30 r180; Top Overlay "2" at 3070,5985 h30 r180; Top Overlay "1" at 3070,6085 h30 r180
HT1: Mechanical 6 "C1" at 1622.5,8411.42 h30 r270
HT2: Mechanical 6 "C1" at 3262.91,8412.06 h30 r270
J1: Top Overlay "CK" at 740,7250 h60; Top Overlay "DI" at 745,7150 h60; Top Overlay "DO" at 735,7055 h60; Top Overlay "MS" at 445,7250 h60; Top Overlay "3+" at 445,7145 h60; Top Overlay "0-" at 445,7045 h60
J4: Mechanical 6 "9" at 907.82,8714.17 h30 r270; Mechanical 6 "8" at 807.82,8764.17 h30 r270; Mechanical 6 "6" at 807.82,8864.17 h30 r270; Mechanical 6 "5" at 907.82,8914.17 h30 r270; Mechanical 6 "7" at 907.82,8814.17 h30 r270; Mechanical 6 "4" at 807.82,8964.17 h30 r270; Mechanical 6 "3" at 907.82,9014.17 h30 r270; Mechanical 6 "2" at 807.82,9064.17 h30 r270; Mechanical 6 "16" at 665.3,8584.25 h30 r270; Mechanical 6 "13" at 352.3,8728.35 h30 r270; Mechanical 6 "10" at 795.22,8664.17 h30 r270; Mechanical 6 "12" at 352.3,9050 h30 r270; Mechanical 6 "15" at 665.3,9194.09 h30 r270; Mechanical 6 "1" at 907.82,9114.17 h30 r270; Mechanical 6 "14" at 352.3,8628.35 h30 r270; Mechanical 6 "11" at 352.3,9150 h30 r270